# Altium PCB SENSEI_Base-Board_Clean.PcbDoc (part 5 of 7)
Units mm, origin at the board's own origin, x right, y up, seen from the top; angles counter-clockwise.
Board outline 25.2 x 15.15 mm, 8 copper layers (Top Sig/Pwr, GND1, Sig1, GND2, Sig2, Pwr, GND3, Bot Sig/Pwr), stack 1.53 mm thick; 187 components, 192 nets, 951 pads, 1831 vias.
Unrouted connection lines stored in the file: 214.
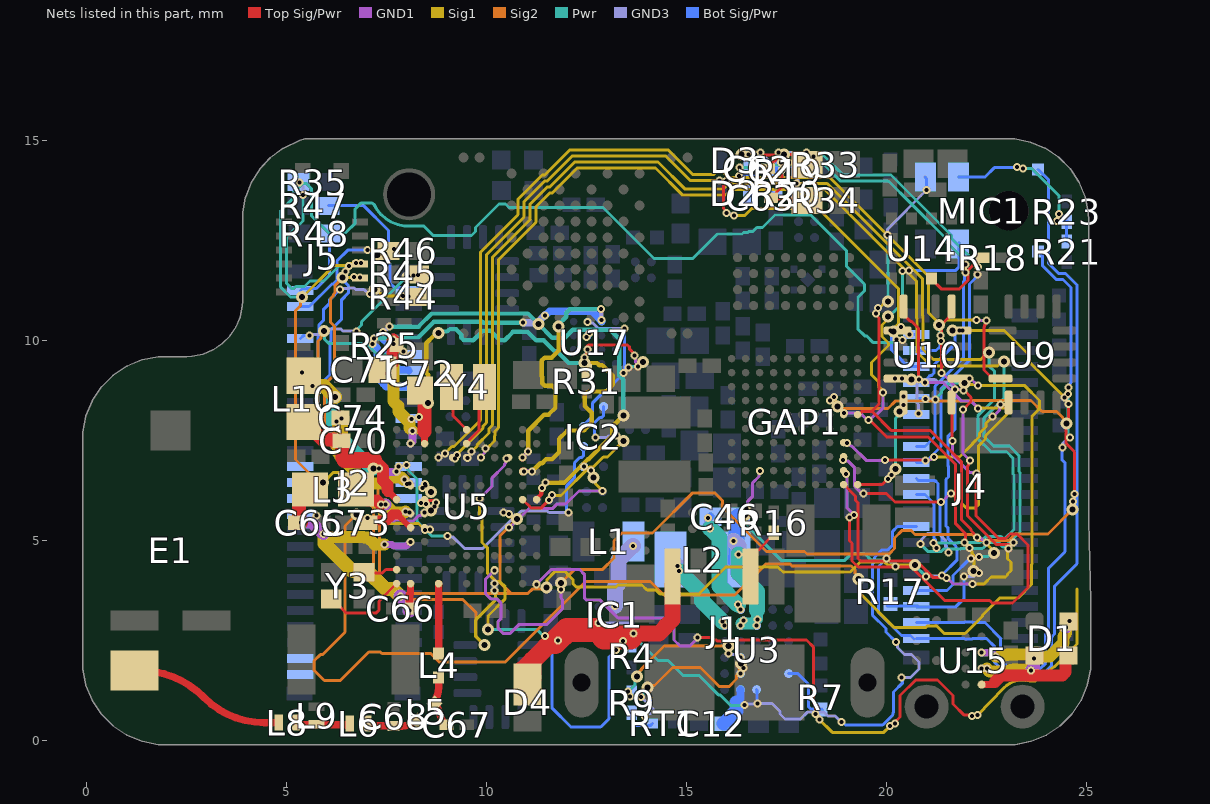
[diagram p10: the nets of this part, all layers, seen from the top]

## Via types
v1: diameter 0.2, hole 0.1, Top Sig/Pwr to GND1, 467 vias
v2: diameter 0.2, hole 0.1, GND3 to Bot Sig/Pwr, 431 vias
v3: diameter 0.2, hole 0.1, GND1 to Sig1, 369 vias
v4: diameter 0.3, hole 0.15, Sig1 to Pwr, 279 vias
v5: diameter 0.2, hole 0.1, Pwr to GND3, 270 vias
v6: diameter 0.3, hole 0.15, Top Sig/Pwr to Bot Sig/Pwr, tented both sides, 15 vias

## Nets (pads, with @x,y where several pads share a name; then routed paths per layer and width w, separated by ;. In a path a pad name is that pad's centre, name@x,y a point inside that pad or via, vN(x,y) a via of type N, cw(c..) or ccw(c..) an arc to the next point about the centre after c; other vN are vias at no path point) (continued)
MIC_CLK: GAP1.J6 J4.36 MIC1.6 R17.2 | length 16
  Top Sig/Pwr w0.075: GAP1.J6@18.925,8.15 18.925,8.179 v1(18.934,8.188) ; v1(19.544,8.018) 19.571,8.018 19.995,7.595 21.034,7.595 21.727,6.902 21.727,5.42 21.969,5.177 21.969,4.974 v1(21.945,4.95)
  GND1 w0.075: v1(18.934,8.188) 19.34,8.188 19.51,8.018 v1(19.544,8.018) 19.578,8.018 19.708,8.149 19.745,8.149 19.915,8.319 v3(19.915,8.704) ; v1(21.945,4.95) v1(21.945,4.95) 22.075,4.819 v3(22.075,4.817)
  GND3 w0.075: v5(20.397,11.736) 20.407,11.746 20.555,11.746 v2(20.565,11.756) ; v2(21.935,4.1) 22.179,4.1 22.271,4.192 v5(22.304,4.192)
  Sig1 w0.075: 19.886,10.103 20.05,9.938 20.05,9.876 19.624,9.45 19.624,9.143 19.791,8.975 19.791,8.861 19.915,8.737 v3(19.915,8.704) ; 19.886,10.103 19.886,10.389 20.035,10.538 v4(20.035,10.599) ; v3(22.075,4.817) 22.075,4.784 22.138,4.721 22.138,4.682 22.186,4.634 22.186,4.259 v4(22.17,4.243)
  Pwr w0.075: v4(20.035,10.599) 20.058,10.599 20.397,10.938 v5(20.397,11.736) ; v4(22.17,4.243) 22.253,4.243 v5(22.304,4.192)
  Bot Sig/Pwr w0.075: R17.2@20.013,3.362 20.745,3.362 J4.36@20.779,3.362 ; v2(20.565,11.756) 21.731,11.756 21.806,11.831 MIC1.6@21.806,12.454 ; J4.36@20.745,3.343 20.779,3.343 21.731,3.343 21.935,3.546 v2(21.935,4.1)
MIC_DATA: GAP1.K6 J4.34 MIC1.1 | length 14.9
  Top Sig/Pwr w0.075: GAP1.K6@19.275,8.15 19.305,8.15 19.386,8.231 19.632,8.231 ; v1(19.737,10.677) 19.737,10.637 19.812,10.562 19.812,8.411 19.632,8.231 ; v1(22.261,5.079) 22.261,5.098 22.109,5.25 22.109,5.281 21.877,5.513 21.877,6.964 21.778,7.062 21.084,7.756 20.106,7.756 19.632,8.231
  GND1 w0.075: v1(19.737,10.677) 19.761,10.701 19.761,10.757 19.787,10.782 v3(19.787,10.816) ; v1(22.261,5.079) 22.269,5.071 22.342,5.071 22.461,4.952 v3(22.495,4.952)
  GND3 w0.075: v5(20.018,12.636) 20.02,12.637 20.02,12.784 v2(20.999,13.763) ; v2(22.109,4.547) 22.131,4.569 22.289,4.569 v5(22.31,4.59)
  Sig1 w0.075: v3(19.787,10.816) 19.82,10.816 19.978,10.974 v4(20.035,10.974) ; v3(22.495,4.952) 22.495,4.918 22.682,4.73 v4(22.682,4.695)
  Pwr w0.075: v5(20.018,12.636) 20.037,12.617 20.037,10.975 v4(20.035,10.974) ; v5(22.31,4.59) 22.325,4.605 22.531,4.605 22.621,4.695 v4(22.682,4.695)
  Bot Sig/Pwr w0.075: J4.34@20.745,3.75 21.508,3.75 21.661,3.903 21.661,4.128 22.081,4.547 v2(22.109,4.547) ; MIC1.1@20.965,14.086 20.999,14.051 v2(20.999,13.763)
MIC_THSEL: GAP1.H7 J4.38 MIC1.5 | length 21.9
  GND1 w0.075: v1(18.579,8.501) 18.587,8.501 18.68,8.594 v3(18.688,8.594)
  Sig2 w0.075: v4(18.776,8.346) 18.818,8.304 19.076,8.304 19.078,8.302 20.034,8.302 20.216,8.484 22.076,8.484 22.092,8.5 23.611,8.5 23.881,8.23 24.246,8.23 24.407,8.069 24.407,8.049 24.495,7.961 v4(24.495,7.921)
  GND3 w0.075: v2(24.393,7.325) 24.403,7.335 24.403,7.419 24.561,7.576 v5(24.582,7.576) ; v5(24.533,8.667) 24.541,8.674 24.541,8.814 v2(24.549,8.822)
  Sig1 w0.075: v3(18.688,8.594) 18.712,8.57 18.712,8.505 18.733,8.484 18.733,8.389 v4(18.776,8.346)
  Pwr w0.075: v4@24.411,7.872 24.411,7.932 24.533,8.055 v5(24.533,8.667) ; v4(24.495,7.921) 24.439,7.865 24.486,7.865 24.534,7.817 24.534,7.659 24.582,7.61 v5(24.582,7.576)
  Bot Sig/Pwr w0.075: J4.38@20.745,2.95 21.944,2.95 21.96,2.966 22.136,2.966 22.152,2.95 22.458,2.95 22.862,2.546 22.852,2.535 22.852,2.014 23.078,1.787 23.832,1.787 23.978,1.934 23.978,2.657 24.048,2.726 24.048,4.31 24.461,4.724 24.461,6.946 24.379,7.028 24.379,7.311 v2(24.393,7.325) ; MIC1.5@23.79,12.225 23.903,12.113 23.903,11.865 24.241,11.527 24.413,11.527 24.611,11.329 24.611,8.947 24.593,8.929 24.573,8.909 24.573,8.846 v2(24.549,8.822)
MIC_WAKE: GAP1.C2 J4.40 MIC1.4 | length 26
  GND1 w0.075: v3(16.503,5.801) 16.527,5.825 16.527,5.983 16.653,6.108 16.653,6.444 16.807,6.599 16.807,6.717 v1(16.831,6.741)
  GND3 w0.075: v2(19.995,4.55) 20.011,4.55 20.204,4.356 v5(20.22,4.356)
  Sig1 w0.075: v4(16.46,5.637) 16.482,5.658 16.482,5.78 v3(16.503,5.801)
  Pwr w0.075: v4(16.46,5.637) 16.5,5.596 16.5,5.375 17.369,4.506 18.956,4.506 19.129,4.679 19.446,4.679 19.615,4.511 20.064,4.511 v5(20.22,4.356)
  Bot Sig/Pwr w0.075: v2(19.995,4.55) 19.799,4.354 19.799,3.585 19.799,3.198 20.369,2.628 20.598,2.628 J4.40@20.686,2.54 ; J4.40@20.745,2.55 21.951,2.55 21.96,2.541 22.136,2.541 22.145,2.55 22.5,2.55 22.702,2.348 22.702,1.952 22.81,1.844 22.81,1.825 22.998,1.637 23.894,1.637 24.128,1.872 24.128,2.595 24.198,2.664 24.198,3.859 24.761,4.423 24.761,7.59 24.763,7.591 24.763,8.146 24.763,9.698 24.763,11.302 24.762,11.389 24.475,11.677 24.322,11.677 ; MIC1.4@23.79,14.275 24.053,14.012 24.053,11.927 24.302,11.678 24.321,11.678
MSP_CS: J2.12 U5.C7 | length 0.7
  Top Sig/Pwr w0.075: U5.C7@8.45,6.025 8.472,6.003 8.655,6.003 8.706,5.952 v1(8.739,5.952)
  GND1 w0.075: v3(8.699,5.852) 8.699,5.878 8.716,5.895 8.716,5.928 v1(8.739,5.952)
  GND3 w0.075: v2(8.357,5.935) 8.364,5.928 8.472,5.928 v5(8.479,5.921)
  Sig1 w0.075: v4(8.615,5.757) 8.615,5.767 v3(8.699,5.852)
MSP_DR1: J2.13 U5.C8 | length 1.1
  Top Sig/Pwr w0.075: U5.C8@8.45,6.375 8.45,6.401 v1(8.466,6.417)
  GND1 w0.075: v3(8.399,6.309) 8.399,6.33 8.466,6.396 v1(8.466,6.417)
  GND3 w0.075: v2(8.009,6.414) 8.223,6.414 8.265,6.373 8.47,6.373 v5(8.473,6.376)
  Sig1 w0.075: v3(8.399,6.309) 8.433,6.309 8.479,6.263 8.563,6.263 v4(8.606,6.22)
  Pwr w0.075: v5(8.473,6.376) 8.473,6.364 8.606,6.231 v4(8.606,6.22)
MSP_DR2: J2.21 U5.H1 | length 15.2
  Top Sig/Pwr w0.075: v1(10.193,3.931) U5.H1@10.2,3.925
  GND1 w0.075: v3(10.193,3.756) v1(10.193,3.931)
  Sig2 w0.075: v4(5.94,10.244) 5.94,10.184 5.855,10.098 5.855,10.055 5.786,9.986 5.786,7.698 6.138,7.346 6.138,7.319 6.46,6.996 6.46,6.932 7.134,6.258 7.134,5.853 7.176,5.811 7.176,4.06 7.708,3.528 9.406,3.528 9.729,3.205 9.729,2.604 v4(9.945,2.388)
  GND3 w0.075: v5(7.925,9.725) 7.959,9.725 8.015,9.669 8.082,9.669 v2(8.106,9.645)
  Sig1 w0.075: v4(9.945,2.388) 9.727,2.605 9.727,3.02 10.253,3.546 10.217,3.582 10.217,3.732 v3(10.193,3.756)
  Pwr w0.075: v4(5.94,10.244) 5.95,10.234 5.95,10.032 6.051,9.931 6.987,9.931 7.27,9.648 7.542,9.648 7.619,9.725 v5(7.925,9.725)
  Bot Sig/Pwr w0.075: J2.21@8.055,9.65 8.101,9.65 v2(8.106,9.645)
MSP_T\R\S\T\: J2.50
MSP_TCK: J2.49
MSP_TDI: J2.39
MSP_TDO: J2.38
MSP_TMS: J2.40
MSP_VCC: J2.37
NetC12_1: C12.1 U3.D1 | length 1.1
  Bot Sig/Pwr w0.2: 16.247,0.957 16.346,1.057 16.346,1.271 U3.D1@16.35,1.275
  Bot Sig/Pwr w0.35: C12.1@15.916,0.425 15.962,0.425 15.968,0.431 15.968,0.469 16.247,0.747 16.247,0.957
NetC46_1: C46.1 L2.1 U3.C5 U3.D5 | length 4.1
  GND3 w0.2: v2(16.35,2.875) 16.425,2.95 v5(16.425,3) ; v2(16.75,2.875) 16.75,3.012 v5(16.767,3.029)
  GND3 w0.4: v2(16.173,4.993) 16.3,4.866 v5(16.3,4.65)
  Pwr w0.3: v5@16.375,2.925 16.647,2.925 16.765,3.043 16.765,3.265
  Pwr w0.4: v5(16.3,4.65) 16.3,4.19 16.765,3.725 16.765,3.265
  Bot Sig/Pwr w0.4: L2.1@16.2,4.525 16.252,4.577 16.252,5.569 16.284,5.6 C46.1@16.304,5.6
NetC46_2: C46.2 U3.D6 | length 2.7
  GND3 w0.2: v2(15.537,5.566) 15.537,5.355 v5(15.585,5.306) ; v5(16.283,3.401) 16.283,3.342 v2(16.35,3.275)
  Pwr w0.4: v5(15.585,5.306) 15.825,5.067 15.825,3.858 v5(16.283,3.401)
  Bot Sig/Pwr w0.2: v2(15.537,5.566) 15.562,5.566 C46.2@15.596,5.6
NetC62_1: C62.1 R19.2 R33.1 | length 4.3
  Top Sig/Pwr w0.075: v1(16.55,14.655) 16.568,14.637 17.342,14.637 ; C62.1@16.955,14.3 17.005,14.3 17.342,14.637 ; C62.1@17.031,14.297 17.042,14.297 C62.1@17.108,14.297 ; C62.1@17.031,14.3 C62.1@17.058,14.326 ; 17.396,14.637 17.342,14.637 ; R33.1@17.981,14.567 17.902,14.646 17.351,14.646 17.342,14.637
  GND1 w0.075: v1(16.55,14.655) 16.552,14.657 16.708,14.657 v3(16.71,14.658)
  GND3 w0.075: v5(16.85,14.7) 17.079,14.471 17.549,14.471 v2(17.565,14.455)
  Sig1 w0.075: v4(16.375,14.65) 16.379,14.654 16.706,14.654 v3(16.71,14.658)
  Pwr w0.075: v4(16.375,14.65) 16.766,14.65 16.816,14.7 v5(16.85,14.7)
  Bot Sig/Pwr w0.075: v2(17.565,14.455) 17.589,14.431 17.589,14.386 17.75,14.225 R19.2@17.8,14.225
NetC63_1: C63.1 R20.2 R34.1 | length 3.9
  Top Sig/Pwr w0.075: C63.1@17.079,13.538 C63.1@17.124,13.538 ; v1(17.384,14.262) 17.384,13.843 17.253,13.713 17.253,13.667 C63.1@17.124,13.538 ; R34.1@18.009,13.45 17.922,13.538 C63.1@17.124,13.538
  GND1 w0.075: v3(17.361,14.45) 17.372,14.439 17.372,14.273 v1(17.384,14.262)
  GND3 w0.075: v5@17.275,14.7 v5(17.3,14.7) ; v5@17.275,14.725 v5(17.3,14.7) ; v2(17.746,13.924) 17.746,13.943 17.78,13.977 17.78,14.54 17.621,14.7 v5(17.3,14.7)
  Sig1 w0.075: v3(17.361,14.45) 17.385,14.474 17.385,14.545 17.429,14.589 v4(17.429,14.65)
  Pwr w0.075: v5(17.3,14.7) 17.379,14.7 v4(17.429,14.65)
  Bot Sig/Pwr w0.075: v2(17.746,13.924) 17.746,13.704 R20.2@17.775,13.675
NetC65_1: C65.1 C66.1 L3.1 U5.B1 U5.B4 | length 7.8
  Top Sig/Pwr w0.18: 8.076,3.639 8.098,3.661 8.098,3.923 U5.B1@8.1,3.925 ; v1(8.1,4.969) U5.B4@8.1,4.975
  Top Sig/Pwr w0.2: 8.076,3.639 8.076,3.272 C66.1@8.092,3.257
  Top Sig/Pwr w0.35: C65.1@5.204,5.452 5.304,5.452 C65.1@5.308,5.456 ; v1(5.355,5.456) C65.1@5.308,5.456 ; L3.1@5.583,6.275 5.562,6.275 5.308,6.021 C65.1@5.308,5.456
  GND1 w0.18: v3(7.446,4.904) 7.45,4.9 7.633,4.9 7.671,4.862 7.988,4.862 8.095,4.969 v1(8.1,4.969)
  GND1 w0.3: v1(5.355,5.456) 5.622,5.456 v3(5.918,5.16)
  GND1 w0.35: v3(7.847,3.597) 8.069,3.374 v1(8.069,3.247)
  Sig1 w0.3: v3(5.918,5.16) v3@5.943,5.135 ; 6.018,5.09 6.92,5.09 6.931,5.078 7.024,5.078 7.199,4.904 v3(7.446,4.904)
  Sig1 w0.35: v3@5.943,5.135 5.943,4.932 6.642,4.234 7.021,4.234 7.47,3.785 7.659,3.785 v3(7.847,3.597)
  other v3: 5.745,5.623
NetC67_1: C67.1 L4.2 L5.1 | length 1.4
  Top Sig/Pwr w0.185: L5.1@8.625,0.9 ccw(c8.203,1.322) 8.8,1.322 L4.2@8.8,1.575 ; L5.1@8.699,0.924 L5.1@8.71,0.871 ; L5.1@8.75,0.9 8.911,0.439 C67.1@8.996,0.4
NetC68_1: C68.1 L5.2 L6.1 | length 1.3
  Top Sig/Pwr w0.185: L6.1@7.02,0.425 7.02,0.388 7.033,0.375 7.662,0.375 C68.1@7.675,0.362 7.883,0.362 ccw(c7.883,0.917) L5.2@8.275,0.525
NetC70_1: C70.1 L10.1 U5.A7 | length 3.8
  Top Sig/Pwr w0.18: 7.518,6.269 7.518,6.185 7.529,6.174 7.598,6.174 7.747,6.025 U5.A7@7.75,6.025
  Top Sig/Pwr w0.3: 7.187,7.013 7.271,6.929 7.281,6.929 7.413,6.797 7.413,6.497 7.518,6.391 7.518,6.269
  Top Sig/Pwr w0.35: L10.1@5.298,8.045 5.388,8.045 5.902,7.531 6.181,7.531 6.206,7.506 6.364,7.506 C70.1@6.371,7.5 6.385,7.5 6.391,7.494 6.391,7.069 6.447,7.013
  Top Sig/Pwr w0.4: 6.447,7.013 7.187,7.013
NetC71_1: C71.1 R25.1 U5.B11 | length 3.6
  Top Sig/Pwr w0.18: v1(8.097,7.427) U5.B11@8.1,7.425
  Top Sig/Pwr w0.3: C71.1@7.598,9.386 7.642,9.43 7.642,9.998 7.667,10.023 7.663,10.023 v1(7.657,10.03)
  GND1 w0.2: v1(8.097,7.427) 8.143,7.473 v3(8.143,7.742)
  GND1 w0.3: v3(7.668,9.912) 7.668,10.019 v1(7.657,10.03) 7.657,9.956 v3@7.669,9.944
  Sig1 w0.3: v3(7.668,9.912) 7.668,8.486 7.792,8.362 7.792,8.233 7.797,8.228 8.072,7.953 8.072,7.813 v3(8.143,7.742)
NetC72_1: C72.1 U5.C11 | length 1.3
  Top Sig/Pwr w0.18: 8.445,7.724 8.448,7.722 8.448,7.427 U5.C11@8.45,7.425
  Top Sig/Pwr w0.35: 8.445,7.724 8.445,8.69 C72.1@8.482,8.726
NetC73_1: C73.1 U5.B5 | length 1.3
  Top Sig/Pwr w0.15: 7.776,5.646 8.096,5.325 U5.B5@8.1,5.325
  Top Sig/Pwr w0.25: C73.1@7,5.5 7.006,5.506 7.506,5.506 7.647,5.647 7.776,5.647
NetC74_1: C74.1 U5.B8 | length 3.5
  Top Sig/Pwr w0.18: v1(8.075,6.425) 8.075,6.4 U5.B8@8.1,6.375
  Top Sig/Pwr w0.2: v1(6.25,7.975) 6.25,7.994 6.331,8.075 C74.1@6.346,8.075
  GND1 w0.18: v3(7.944,6.53) 7.95,6.53 8.051,6.429 8.071,6.429 v1(8.075,6.425)
  GND1 w0.2: v1(6.25,7.975) 6.325,8.05 v3(6.375,8.05)
  Sig1 w0.3: 6.331,7.212 6.331,7.113 7.02,6.425 7.37,6.425 7.422,6.477 7.445,6.477 7.541,6.573 7.869,6.573 v3@7.933,6.509
  Sig1 w0.4: 6.331,7.212 6.331,8.006 v3(6.375,8.05)
NetD1_2: D1.2 U15.B2 | length 2.9
  Top Sig/Pwr w0.18: U15.B2@22.375,2.2 22.379,2.204 22.381,2.204 v1(22.377,2.2)
  GND1 w0.18: v1(22.377,2.2) 22.381,2.196 22.631,2.196 22.723,2.103 v3(22.728,2.103)
  GND1 w0.3: v3(24.49,2.822) 24.49,2.903 v1(24.574,2.987)
  Sig1 w0.3: v3(22.728,2.103) 22.786,2.103 22.891,2.103 23.008,2.137 23.02,2.15 23.763,2.15 23.809,2.103 24.081,2.103 24.422,2.444 24.422,2.607 24.49,2.675 v3(24.49,2.822)
NetD1_3: D1.3 U15.D2 | length 2.7
  Top Sig/Pwr w0.18: U15.D2@22.375,1.4 22.379,1.404 22.647,1.404 22.707,1.464
  Top Sig/Pwr w0.3: 22.707,1.464 22.876,1.633 24.394,1.633 24.475,1.713 24.475,2.065 D1.3@24.57,2.16
NetD1_4: D1.4 U15.C2 | length 1.6
  Top Sig/Pwr w0.18: U15.C2@22.375,1.8 v1(22.375,1.802)
  GND1 w0.18: v1(22.375,1.802) 22.377,1.8 22.508,1.8 v3(22.511,1.798)
  GND1 w0.3: v3(23.607,1.751) 23.679,1.823 v1(23.679,2.05)
  Sig1 w0.3: v3(22.511,1.798) 22.507,1.794 22.573,1.728 23.046,1.728 23.081,1.762 23.176,1.775 23.607,1.775 v3(23.607,1.751)
NetD2_1: D2.1 J4.16 R20.1 | length 13.9
  GND3 w0.075: v2(16.314,14.114) 16.32,14.119 16.32,14.32 v5(16.325,14.325) ; v2(21.975,11.7) v2(21.975,11.7) 21.976,11.901 v5(21.977,11.902)
  Pwr w0.075: v5(16.325,14.325) 16.713,14.325 16.775,14.388 17.32,14.388 17.538,14.387 18.45,14.388 18.852,13.986 20.025,13.986 20.034,13.977 20.061,13.977 20.594,13.444 21.475,12.563 21.475,12.492 21.971,11.996 21.971,11.908 v5(21.977,11.902)
  Bot Sig/Pwr w0.075: v2(16.314,14.114) 16.736,14.114 R20.1@17.175,13.675 ; D2.1@16.56,13.691 16.576,13.675 R20.1@17.175,13.675 ; R20.1@17.225,13.675 R20.1@17.175,13.675 ; J4.16@20.745,7.35 20.96,7.35 21.209,7.599 21.209,8.855 21.925,9.571 21.925,11.478 21.951,11.504 21.951,11.676 v2(21.975,11.7)
NetD3_1: D3.1 J4.18 R19.1 | length 13
  GND3 w0.075: v2(18,14.7) 18.034,14.7 18.11,14.624 18.151,14.624 v5(18.175,14.6) ; v2(22.275,11.65) 22.277,11.652 22.277,11.836 v5(22.28,11.838)
  Pwr w0.075: v5(18.175,14.6) 18.188,14.613 18.437,14.613 18.914,14.136 19.817,14.136 19.819,14.137 20.113,14.137 21.625,12.625 21.625,12.554 22.315,11.865 22.288,11.838 v5(22.28,11.838)
  Bot Sig/Pwr w0.075: D3.1@16.637,14.315 16.639,14.313 17.163,14.313 R19.1@17.25,14.225 17.25,14.441 17.509,14.7 v2(18,14.7) ; J4.18@20.745,6.95 20.96,6.95 21.359,7.349 21.359,8.793 22.075,9.509 22.075,11.416 22.275,11.616 v2(22.275,11.65)
NetD4_2: D4.2 J1.1 | length 6.4
  Top Sig/Pwr w0.4: D4.2@10.899,1.796 11.128,2.025 11.462,2.359 ; D4.2@11.025,1.4 11.175,1.55 11.175,1.978 11.509,2.312 11.658,2.46 11.707,2.46 ; 13.601,2.581 13.701,2.681 14.315,2.681 14.476,2.842 14.476,2.859 14.644,3.026 14.644,3.87 J1.1@14.641,3.873
  Top Sig/Pwr w0.5: 12.709,2.775 12.903,2.581 12.931,2.581
  Top Sig/Pwr w0.6: 11.707,2.46 12.015,2.768 12.717,2.768 ; 12.931,2.581 13.601,2.581
NetE1_1: E1.1 L8.2 | length 4
  Top Sig/Pwr w0.185: E1.1@1.2,1.75 1.708,1.719 cw(c1.315,-0.566) 2.172,1.589 cw(c1.365,-0.439) 2.942,1.07 2.943,1.069 ccw(c4.44,2.57) 4.44,0.45 L8.2@4.8,0.45
NetIC1_A2: IC1.A2 L1.1 | length 1.7
  GND3 w0.4: v2(13.206,3.359) 13.206,3.838 13.301,3.933 13.301,4.515 v2(13.656,4.87)
  Bot Sig/Pwr w0.075: IC1.A2@13.2,3.35 13.2,3.353 v2(13.206,3.359)
NetIC1_B3: IC1.B3 R4.2 | length 1.4
  GND3 w0.075: v2(12.799,2.944) 13.555,2.944 13.581,2.918 13.645,2.854 13.645,2.7 v2(13.669,2.676)
  Bot Sig/Pwr w0.075: IC1.B3@12.8,2.95 IC1.B3@12.8,2.945 ; R4.2@13.645,2.352 13.669,2.376 v2(13.669,2.676) ; v2(12.799,2.944) IC1.B3@12.8,2.945
NetJ1_4: J1.4 R16.1 | length 1.4
  Top Sig/Pwr w0.075: J1.4@16.6,4.1 16.6,4.596 16.766,4.761 16.795,4.761 16.988,4.953 16.988,4.963 17.175,5.15 R16.1@17.175,5.196
NetJ2_25: J2.25 R47.2 | length 3.6
  Bot Sig/Pwr w0.075: R47.2@6.051,13.38 6.919,13.38 7.546,12.753 7.546,12.306 7.563,12.289 7.563,11.949 7.587,11.925 7.587,11.435 7.7,11.322 7.988,11.322 J2.25@8.056,11.254
NetJ2_26: J2.26 R48.1 | length 1.9
  Bot Sig/Pwr w0.075: J2.26@5.345,11.25 5.398,11.303 5.741,11.303 6.077,11.639 R48.1@6.077,12.674
NetJ2_27: J2.27 R46.1 | length 3.3
  GND1 w0.075: v3(7.458,12.178) 7.492,12.178 7.578,12.264 7.658,12.264 v1(7.682,12.288)
  GND3 w0.075: v2(7.02,12.259) 7.048,12.259 7.189,12.118 v5(7.218,12.118)
  Sig1 w0.075: v4(7.268,12.139) 7.288,12.158 7.438,12.158 v3(7.458,12.178)
  Pwr w0.075: v5(7.218,12.118) 7.247,12.118 v4(7.268,12.139)
  Bot Sig/Pwr w0.075: J2.27@5.345,10.85 5.565,10.85 6.132,11.417 6.169,11.417 6.262,11.511 6.262,11.993 6.529,12.259 v2(7.02,12.259)
NetJ2_29: J2.29 R45.1 | length 3.7
  Top Sig/Pwr w0.075: R45.1@8.285,11.658 8.29,11.653 v1(8.29,11.637)
  GND1 w0.075: v3(8.172,11.623) 8.179,11.63 8.283,11.63 v1(8.29,11.637)
  GND3 w0.075: v2(5.575,10.125) 5.598,10.148 5.788,10.148 5.825,10.185 5.952,10.185 6.054,10.286 6.361,10.286 6.406,10.241 6.734,10.241 v5(6.747,10.229)
  Sig1 w0.075: v4(8.026,11.595) 8.054,11.623 v3(8.172,11.623)
  Pwr w0.075: v5(6.747,10.229) 6.747,10.262 6.871,10.387 6.871,10.47 7.995,11.595 v4(8.026,11.595)
  Bot Sig/Pwr w0.075: J2.29@5.345,10.05 5.417,10.122 5.575,10.122 v2(5.575,10.125)
NetJ2_31: J2.31 R44.1 | length 4.7
  Top Sig/Pwr w0.075: v1(8.043,11.107) 8.066,11.085 R44.1@8.291,11.085
  GND1 w0.075: v3(7.911,11.12) 7.917,11.114 8.037,11.114 v1(8.043,11.107)
  GND3 w0.075: v2(6.335,11.283) 6.359,11.307 6.543,11.307 6.553,11.317 6.689,11.317 6.734,11.272 6.941,11.272 7.05,11.164 v5(7.083,11.164)
  Sig1 w0.075: v4(7.201,11.276) 7.247,11.276 7.403,11.12 v3(7.911,11.12)
  Pwr w0.075: v5(7.083,11.164) 7.086,11.164 7.199,11.276 v4(7.201,11.276)
  Bot Sig/Pwr w0.075: J2.31@5.345,9.25 5.565,9.25 5.782,9.467 5.782,9.488 5.788,9.493 5.788,10.094 5.807,10.113 5.807,10.393 5.917,10.503 5.917,10.773 6.076,10.932 6.076,11.024 v2(6.335,11.283)
NetJ2_34: J2.34 R35.1 | length 9.1
  GND3 w0.075: v2(5.318,13.953) 5.41,13.862 v5(5.41,13.635) ; v2(6.475,11.725) 6.475,11.754 6.562,11.841 v5(6.562,11.871)
  Pwr w0.075: v5(5.41,13.635) 5.41,12.989 5.132,12.711 5.123,12.711 5.002,12.59 5.002,11.429 5.123,11.308 5.185,11.308 5.231,11.354 5.45,11.354 5.585,11.489 5.937,11.489 6.312,11.864 6.555,11.864 v5(6.562,11.871)
  Bot Sig/Pwr w0.075: J2.34@5.345,8.05 5.565,8.05 5.782,8.267 5.782,8.288 5.788,8.293 5.788,8.86 6.082,9.155 6.082,9.24 6.088,9.246 6.088,9.97 6.107,9.989 6.107,10.269 6.376,10.538 6.376,11.024 6.547,11.195 6.547,11.371 6.475,11.443 v2(6.475,11.725)
NetL2_2: L2.2 U3.E5 | length 2
  GND3 w0.2: v5(15.9,2.975) 15.95,2.925 v2(15.95,2.875)
  GND3 w0.4: v2(14.777,4.367) 14.813,4.331 v5(14.813,4.237)
  Pwr w0.4: v5(14.813,4.237) 15.384,3.666 15.384,3.491 v5(15.9,2.975)
NetL3_2: L3.2 U5.B6 | length 1.5
  Top Sig/Pwr w0.18: v1(8.074,5.701) U5.B6@8.1,5.675
  Top Sig/Pwr w0.3: L3.2@6.976,6.294 6.976,6.058 7.038,5.996 7.261,5.996 7.356,5.901 v1(7.36,5.901)
  GND1 w0.18: v3(7.976,5.726) 7.98,5.722 8.009,5.722 8.026,5.705 8.071,5.705 v1(8.074,5.701)
  GND1 w0.3: v1(7.36,5.901) 7.469,5.901 v3(7.471,5.899)
  Sig1 w0.3: v3(7.471,5.899) 7.671,5.698 7.949,5.698 v3(7.976,5.726)
NetL4_1: L4.1 U5.D1 | length 1.8
  Top Sig/Pwr w0.185: L4.1@8.8,2.168 U5.D1@8.8,3.925
NetL6_2: L6.2 L8.1 L9.2 | length 1.6
  Top Sig/Pwr w0.185: L8.1@5.253,0.425 5.24,0.438 L8.1@5.24,0.45 ccw(c5.361,0.571) 5.361,0.4 L9.2@5.75,0.4 ; L9.2@5.858,0.392 L9.2@5.793,0.4 ; L6.2@6.567,0.32 6.58,0.332 L6.2@6.58,0.425 ; L6.2@6.575,0.4 L9.2@5.793,0.4 ; L9.2@5.793,0.4 5.755,0.4 L9.2@5.75,0.405 L9.2@5.793,0.4
NetL10_2: L10.2 U5.A9 | length 4.1
  Top Sig/Pwr w0.1: v1(7.749,6.723) v1(7.749,6.723)
  Top Sig/Pwr w0.35: v1(5.389,9.206) 5.411,9.184 L10.2@5.426,9.184
  GND1 w0.1: v1@7.741,6.716 v1(7.749,6.723)
  GND1 w0.2: v3(7.311,6.802) 7.397,6.716 v1@7.741,6.716
  GND1 w0.35: v1(5.389,9.206) 5.389,9.13 v3(5.65,8.869)
  Sig1 w0.1: v4(7.175,6.8) 7.308,6.8 v3(7.311,6.802)
  Sig1 w0.35: v3(5.65,8.869) 5.936,8.869 v4(6.214,8.591)
  Pwr w0.35: v4(6.214,8.591) 6.102,8.48 6.102,7.821 7.124,6.8 v4(7.175,6.8)
NetMIC1_2: MIC1.2 R21.1 R23.2 | length 4.3
  GND3 w0.075: v2(23.26,14.342) 23.281,14.321 23.395,14.321 v5(23.416,14.3) ; v2(24.265,12.987) 24.286,13.007 24.286,13.149 v5(24.306,13.169)
  Pwr w0.075: v5(23.416,14.3) 23.631,14.3 24.306,13.626 v5(24.306,13.169)
  Bot Sig/Pwr w0.075: MIC1.2@21.798,14.087 22.457,14.087 22.693,14.324 23.242,14.324 v2(23.26,14.342) ; v2(24.265,12.987) 24.514,12.987 R23.2@24.525,12.976 ; R21.1@24.5,12.475 24.5,12.929 R23.2@24.514,12.942
NetR7_1: R7.1 U3.A2 | length 1.5
  Bot Sig/Pwr w0.075: U3.A2@17.55,1.675 17.779,1.675 18.046,1.408 18.046,0.844 18.097,0.793 18.366,0.793 R7.1@18.392,0.766
NetR9_1: R9.1 RT1.1 U3.D2 | length 5.5
  Sig2 w0.075: v4(14.021,1.333) 14.064,1.376 14.199,1.376 14.652,1.829 15.343,1.829 15.825,1.347 16.057,1.347 16.247,1.537 16.247,1.633 16.32,1.706 16.32,1.89 v4(16.363,1.933)
  GND3 w0.075: v5(13.865,1.09) 14.155,0.8 14.155,0.728 14.104,0.677 14.065,0.677 13.988,0.6 v2(13.954,0.6) ; v2(16.35,1.675) 16.35,1.709 16.4,1.759 16.4,1.777 v5@16.43,1.807
  Pwr w0.075: v5(13.865,1.09) 13.865,1.124 14.025,1.283 v4@14.025,1.325 ; v4(16.363,1.933) 16.363,1.878 v5(16.424,1.817)
  Bot Sig/Pwr w0.075: R9.1@13.625,0.696 13.642,0.678 13.642,0.442 13.703,0.382 13.954,0.382 ; v2(13.954,0.6) 13.954,0.382 ; RT1.1@14.149,0.425 14.106,0.382 13.954,0.382
NetR9_2: R9.2 U3.D3 | length 3.8
  Sig2 w0.075: v4(13.755,1.598) 13.755,1.659 13.878,1.781 13.878,1.796 13.937,1.855 13.937,1.857 14.443,2.363 15.191,2.363 15.193,2.365 v4(16.045,2.365)
  GND3 w0.075: v5(13.538,1.222) 13.538,1.189 13.591,1.136 v2(13.591,1.103) ; v5(16.046,2.171) 16.07,2.147 16.248,2.147 16.314,2.081 v2(16.348,2.081)
  Pwr w0.075: v5(13.538,1.222) 13.712,1.396 13.712,1.555 v4(13.755,1.598) ; v5@16.046,2.172 v4(16.045,2.365)
NetR18_2: R18.2 U14.3 | length 1.9
  Top Sig/Pwr w0.075: U14.3@21.125,11.55 21.125,11.537 21.377,11.285 21.811,11.285 22.033,11.507 22.033,11.759 22.255,11.981 22.317,11.981 R18.2@22.421,12.086
NetU5_A1: U5.A1 Y3.1 | length 2.2
  Top Sig/Pwr w0.075: Y3.1@6.085,3.511 6.169,3.511 6.488,3.192 7.242,3.192 7.308,3.258 7.308,3.483 U5.A1@7.75,3.925
NetU5_A2: U5.A2 Y3.3 | length 0.8
  Top Sig/Pwr w0.075: Y3.3@7.01,4.193 7.397,4.193 7.479,4.275 U5.A2@7.75,4.275
NetU5_F11: U5.F11 Y4.1 | length 1.6
  Top Sig/Pwr w0.075: U5.F11@9.5,7.425 9.5,7.448 9.807,7.755 9.807,8.669 Y4.1@9.988,8.85
NetU5_F12: U5.F12 Y4.2 | length 1.2
  Top Sig/Pwr w0.075: Y4.2@9.163,8.796 9.163,8.112 U5.F12@9.5,7.775
nRF_btn: U5.L1 | length 20.6
  Top Sig/Pwr w0.075: v1(11.25,3.907) U5.L1@11.25,3.925 ; v1(15.269,2.575) 15.623,2.575 15.685,2.513 15.747,2.513 15.773,2.486 16.127,2.486 16.153,2.513 17.997,2.513 18.178,2.331 18.178,0.938 18.217,0.899 v1(18.217,0.659) ; v1(20.206,0.426) 20.206,0.46 20.337,0.591 20.337,1.124 20.726,1.513 21.274,1.513 21.663,1.124 21.663,0.916 21.943,0.636 22.109,0.636 v1(22.133,0.612)
  GND1 w0.075: v1(11.25,3.907) 11.25,3.911 11.614,4.275 12.322,4.275 12.453,4.144 12.453,3.555 12.497,3.511 12.844,3.511 13.294,3.061 14.539,3.061 14.685,2.915 14.685,2.517 14.839,2.363 15.081,2.363 15.269,2.551 v1(15.269,2.575) ; v1(18.217,0.659) 18.217,0.645 18.324,0.538 v3(18.324,0.524) ; v3(20.083,0.359) 20.111,0.359 20.178,0.426 v1(20.206,0.426) ; v1(22.133,0.612) 22.146,0.625 22.262,0.625 v3(22.275,0.638)
  Sig1 w0.075: v3(18.324,0.524) 18.642,0.206 19.93,0.206 v3(20.083,0.359) ; v3(22.275,0.638) 22.923,1.309 cw(c23.4,0.85) 23.575,1.489 23.716,1.489 23.736,1.504 24.19,1.841 24.222,1.873 24.763,2.413 24.763,3.792
nRF_P0.04: J4.20 U5.G10 | length 33.8
  Top Sig/Pwr w0.075: U5.G10@9.85,7.075 9.855,7.08 v1(9.865,7.08)
  GND1 w0.075: v1(9.865,7.08) 9.865,7.107 9.948,7.19 9.948,7.276 v3(9.968,7.296)
  GND3 w0.075: v5(20.85,4.909) 20.874,4.933 20.874,5.025 21.024,5.175 21.309,5.175 21.475,5.009 21.475,4.846 21.528,4.793 21.528,4.731 v2(21.552,4.707)
  Sig1 w0.075: v3(9.968,7.296) 10.002,7.296 10.196,7.491 10.196,7.61 10.21,7.623 10.21,7.735 10.296,7.822 10.296,12.024 11.234,12.961 11.234,13.349 11.577,13.692 11.643,13.692 12.264,14.312 13.715,14.312 14.224,14.312 14.901,13.635 15.969,13.635 16.114,13.779 18.453,13.779 20.748,11.485 20.748,10.57 20.763,10.555 20.763,9.717 21.114,9.365 22.771,9.365 22.878,9.471 v4(22.935,9.471)
  Pwr w0.075: v5(20.85,4.909) 21.028,4.731 21.374,4.731 21.436,4.794 21.841,4.794 21.85,4.802 22.401,4.802 22.556,4.957 22.791,4.957 22.905,4.843 22.967,4.843 23.337,5.213 23.337,6.701 23.313,6.725 23.313,7.121 23.071,7.363 22.675,7.363 22.431,7.607 22.431,8.056 22.935,8.56 v4(22.935,9.471)
  Bot Sig/Pwr w0.075: J4.20@20.745,6.55 20.799,6.496 21.215,6.496 21.286,6.425 21.286,6.026 21.289,6.022 21.338,5.974 21.338,5.141 21.382,5.096 21.382,4.994 21.496,4.88 21.496,4.797 21.552,4.741 v2(21.552,4.707)
nRF_P0.05: J4.22 U5.F10 | length 31.5
  Top Sig/Pwr w0.075: U5.F10@9.5,7.075 9.518,7.075 v1(9.526,7.068)
  GND1 w0.075: v1(9.526,7.068) 9.526,7.097 9.625,7.196 v3(9.625,7.225)
  GND3 w0.075: v5(21.17,4.944) 21.17,4.918 21.249,4.839 v2(21.249,4.814)
  Sig1 w0.075: v3(9.625,7.225) 9.765,7.365 9.765,7.393 10.06,7.689 10.06,7.797 10.146,7.884 10.146,12.086 11.084,13.023 11.084,13.411 11.515,13.842 11.581,13.842 12.202,14.462 14.286,14.462 14.963,13.785 15.907,13.785 16.051,13.929 18.515,13.929 20.898,11.547 20.898,10.632 20.913,10.617 20.913,9.779 21.167,9.525 22.356,9.525 22.532,9.701 v4(22.557,9.701)
  Pwr w0.075: v5(21.17,4.944) 21.779,4.944 21.788,4.952 22.339,4.952 22.494,5.107 22.853,5.107 22.905,5.056 22.967,5.056 23.187,5.275 23.187,6.639 23.163,6.663 23.163,7.059 23.009,7.213 22.613,7.213 22.281,7.545 22.281,8.118 22.702,8.539 22.702,9.228 22.557,9.373 v4(22.557,9.701)
  Bot Sig/Pwr w0.075: J4.22@20.745,6.15 20.96,6.15 21.136,5.974 21.136,5.963 21.188,5.912 21.188,5.064 21.225,5.026 21.225,4.837 v2(21.249,4.814)
nRF_P0.07/AMUX: J4.26 U3.C1 U5.J10 | length 27.3
  Top Sig/Pwr w0.075: v1(10.5,7.05) 10.5,7.062 10.513,7.075 U5.J10@10.55,7.075
  GND1 w0.075: v3(9.825,6.05) 9.83,6.05 10.13,6.35 10.13,6.557 10.448,6.874 10.448,6.911 10.476,6.939 10.476,7.026 v1(10.5,7.05)
  GND3 w0.075: v5(11.457,2.611) 11.491,2.611 11.572,2.53 11.755,2.53 v2(11.779,2.507) ; v2(13.236,2.263) 13.236,2.294 13.407,2.464 v5(13.407,2.495) ; v5(16.448,0.893) 16.464,0.909 16.759,0.909 v2(16.775,0.925) 17.14,0.925 17.334,0.731 17.334,0.662 17.459,0.537 17.845,0.537 18.019,0.711 18.436,0.711 18.461,0.686 18.487,0.66 18.533,0.614 18.715,0.614 v2(18.867,0.462) ; v2(20.24,2.459) 20.24,2.425 20.275,2.39 20.275,2.325 20.45,2.15 20.622,2.15 20.808,1.964 20.808,1.788 20.595,1.575 20.382,1.575 v2@20.378,1.578
  Sig1 w0.075: v3(9.825,6.05) 9.825,5.658 9.884,5.599 9.884,4.955 10.017,4.821 10.017,4.195 10.239,3.973 10.337,3.973 10.465,3.844 10.465,3.546 10.034,3.114 v4(10.034,2.772)
  Pwr w0.075: v4(10.034,2.772) 11.264,2.772 11.425,2.611 v5(11.457,2.611) ; v5(13.407,2.495) 13.791,2.495 14.285,2 14.541,2 14.909,1.632 15.307,1.632 15.794,1.145 15.833,1.145 16.098,0.88 16.435,0.88 v5(16.448,0.893)
  Bot Sig/Pwr w0.075: v2@11.754,2.496 11.754,2.45 11.629,2.325 11.629,1.555 11.629,0.82 12.112,0.337 12.852,0.337 13.062,0.547 13.062,2.089 v2(13.236,2.263) ; U3.C1@16.75,1.275 16.763,1.263 16.763,0.937 v2(16.775,0.925) ; v2(18.867,0.462) 18.9,0.462 18.974,0.387 19.903,0.387 20.128,0.613 20.142,0.626 cw(c21.88,0.122) 20.172,0.722 20.172,1.216 20.402,1.446 20.402,1.488 20.399,1.499 v2(20.375,1.575) ; 19.649,3.188 19.649,3.135 19.983,2.802 19.983,2.716 v2(20.24,2.459) ; 19.649,3.188 19.649,3.647 19.649,4.419 19.696,4.466 19.696,4.577 19.881,4.762 20.027,4.762 20.152,4.888 20.152,5.233 20.27,5.35 J4.26@20.745,5.35
nRF_P0.12_GAP_GPIO64: J4.12 J5.10 U5.J6 U10.4 | length 34.7
  Top Sig/Pwr w0.075: J5.10@6.718,11.586 6.824,11.586 v1(6.834,11.576) ; U5.J6@10.55,5.675 10.557,5.675 v1(10.562,5.67)
  Top Sig/Pwr w0.18: v1(20.212,9.054) 20.216,9.05 U10.4@20.225,9.05
  GND1 w0.075: v3(6.688,11.584) 6.692,11.58 6.83,11.58 v1(6.834,11.576) ; v3(10.418,5.699) 10.433,5.685 10.547,5.685 v1(10.562,5.67) ; v1(20.212,9.054) 20.214,9.052 20.388,9.052 v3(20.389,9.05)
  Sig2 w0.075: v4(6.393,11.574) 6.393,11.563 6.213,11.383 6.213,11.2 6.172,11.158 6.172,11.118 6.098,11.045 6.098,10.457 6.202,10.353 6.202,9.161 5.951,8.91 5.951,7.744 6.288,7.408 6.288,7.381 6.618,7.051 6.618,6.986 7.284,6.32 7.284,5.915 7.326,5.873 7.326,4.122 7.768,3.681 10.603,3.681 ; v4(10.759,5.542) 10.331,5.115 10.331,3.953 10.603,3.681 ; v4(11.5,3.822) 11.464,3.785 11.14,3.785 11.036,3.681 10.603,3.681
  GND3 w0.075: v2(20.8,8.175) 20.8,8.403 20.766,8.437 20.766,8.946 20.8,8.98 v5@20.8,9.025 ; v5(20.812,9.026) 20.816,9.022 21.215,9.022 21.268,8.969 21.519,8.969 v2(21.712,8.775) ; v5(20.982,4.097) 20.996,4.111 21.37,4.111 v2(21.384,4.125)
  Sig1 w0.075: v4(6.393,11.574) 6.398,11.579 6.683,11.579 v3(6.688,11.584) ; v3(10.418,5.699) 10.452,5.699 10.566,5.585 10.715,5.585 v4(10.759,5.542) ; v4(11.5,3.822) 11.514,3.835 11.514,4.03 11.715,4.231 11.954,4.231 12.157,4.028 12.157,3.924 12.239,3.842 13.234,3.842 13.284,3.892 13.887,3.892 14.017,3.761 14.24,3.761 14.341,3.66 15.298,3.66 15.974,4.336 17.287,4.336 17.408,4.215 19.089,4.215 19.334,4.46 19.956,4.46 20.029,4.387 v4(20.712,4.387) ; v3(20.389,9.05) 20.399,9.041 20.611,9.041 v4(20.621,9.031)
  Pwr w0.075: v4(20.621,9.031) 20.623,9.028 20.809,9.028 v5(20.812,9.026) ; v4(20.712,4.387) 20.712,4.377 20.982,4.107 v5(20.982,4.097)
  Bot Sig/Pwr w0.075: J4.12@20.745,8.15 20.77,8.175 v2(20.8,8.175) ; v2(21.384,4.125) 21.384,4.139 21.764,4.519 21.764,4.795 21.732,4.827 21.732,4.855 21.532,5.056 21.532,5.322 21.488,5.366 21.488,6.531 21.546,6.59 21.546,6.859 21.53,6.874 21.53,7.596 21.712,7.778 v2(21.712,8.775)
nRF_P0.12_GAP_GPIO64_GAP: GAP1.K1 U10.5 | length 3
  Top Sig/Pwr w0.075: GAP1.K1@19.275,6.4 19.89,6.4 v1(20.03,6.54)
  GND1 w0.075: v1(20.03,6.54) 20.03,6.547 20.122,6.639 v3(20.122,6.646) ; v3(20.418,8.386) 20.421,8.388 20.421,8.601 v1(20.423,8.604)
  Sig1 w0.075: v3(20.122,6.646) 20.122,6.669 20.22,6.767 v4(20.22,6.79) ; v4(20.324,8.221) 20.324,8.258 20.418,8.352 v3(20.418,8.386)
  Pwr w0.075: v4(20.22,6.79) 20.22,8.056 20.324,8.16 v4(20.324,8.221)
nRF_P0.31: J4.2 J5.8 U5.C5 | length 35.1
  Top Sig/Pwr w0.075: J5.8@6.718,11.936 v1(6.854,11.936) ; U5.C5@8.45,5.325 8.472,5.303 8.529,5.303 8.555,5.277 v1(8.589,5.277)
  GND1 w0.075: v3(6.74,11.941) 6.849,11.941 v1(6.854,11.936) ; v3(8.457,5.268) 8.461,5.273 8.584,5.273 v1(8.589,5.277)
  Sig2 w0.075: v4(5.386,11.091) 5.342,11.048 5.342,10.865 5.223,10.746 5.223,7.025 5.757,6.491 5.87,6.491 v4(5.913,6.448)
  GND3 w0.075: v5(20.403,10.009) 20.418,10.009 20.559,10.151 v2(20.574,10.151)
  Sig1 w0.075: v4(5.386,11.091) 5.4,11.091 6.19,11.882 6.486,11.882 6.527,11.923 6.722,11.923 v3(6.74,11.941) ; v4(5.913,6.448) 6.166,6.701 6.372,6.701 6.911,6.162 6.999,6.162 7.208,5.953 7.208,5.79 7.569,5.43 8.295,5.43 v3(8.457,5.268)
  Pwr w0.075: v4(5.386,11.091) 5.096,11.091 4.852,11.336 4.852,13.242 5.144,13.534 5.144,13.669 5.397,13.922 5.498,13.922 5.622,13.798 5.622,13.12 6.036,12.707 6.487,12.707 6.714,12.933 6.714,13.289 6.868,13.443 7.12,13.443 7.183,13.401 ccw(c8.048,13.825) 7.929,12.87 cw(c7.92,12.795) 7.953,12.862 8.43,12.862 8.664,12.628 9.624,12.628 9.722,12.726 9.722,12.828 10.309,13.415 10.473,13.415 10.559,13.329 12.908,13.329 14.186,12.051 15.154,12.051 15.767,12.663 16.386,12.663 16.421,12.699 16.519,12.699 16.543,12.723 16.648,12.723 16.755,12.829 16.897,12.829 17.209,13.141 18.106,13.141 18.998,12.249 18.998,11.855 19.447,11.407 19.447,11.245 19.279,11.077 19.279,10.292 19.451,10.121 19.496,10.121 19.668,9.949 20.257,9.949 v5(20.403,10.009)
  Bot Sig/Pwr w0.075: v2(20.574,10.151) 20.575,10.15 J4.2@20.745,10.15
nRF_P1.00_GAP_GPIO60: J4.4 U5.D10 U9.4 | length 25
  Top Sig/Pwr w0.075: v1(8.793,7.08) 8.798,7.075 U5.D10@8.8,7.075 ; v1(22.493,10.498) 22.469,10.474 22.469,10.399 22.442,10.372 22.442,10.345 22.437,10.34 22.437,9.263 22.65,9.05 U9.4@22.85,9.05
  GND1 w0.075: v1(8.793,7.08) 8.827,7.08 8.902,7.155 8.936,7.155 v3(8.96,7.179) ; v3(22.25,10.51) 22.257,10.504 22.487,10.504 v1(22.493,10.498)
  GND3 w0.075: v5(21.348,10.13) 21.359,10.13 21.359,9.99 v2(21.358,9.989)
  Sig1 w0.075: v3(8.96,7.179) 9.131,7.349 9.188,7.349 9.846,8.008 9.846,12.21 10.784,13.147 10.784,13.535 11.39,14.142 11.457,14.142 12.077,14.763 13.902,14.763 14.543,14.763 15.157,14.148 15.669,14.148 15.731,14.21 15.907,14.21 16.038,14.079 18.577,14.079 21.048,11.609 21.048,10.694 21.313,10.429 21.313,10.395 v4(21.304,10.395) ; v4@21.332,10.41 21.393,10.41 21.5,10.517 22.244,10.517 v3(22.25,10.51)
  Pwr w0.075: v4(21.304,10.395) 21.308,10.391 21.313,10.391 21.337,10.367 21.337,10.158 21.357,10.138 v5(21.348,10.13)
  Bot Sig/Pwr w0.075: J4.4@20.745,9.75 21.236,9.75 21.334,9.848 21.334,9.965 v2(21.358,9.989)
nRF_P1.00_GAP_GPIO60_GAP: GAP1.J4 U9.5 | length 5
  Top Sig/Pwr w0.075: v1(19.956,7.012) 20.181,7.012 20.183,7.014 20.961,7.014 v1(20.975,7) ; v1(22.85,8.399) 23.024,8.399 U9.5@23.05,8.425
  GND1 w0.075: v1(19.008,7.442) 19.028,7.442 19.105,7.365 19.13,7.365 19.489,7.007 19.951,7.007 v1(19.956,7.012) ; v1(20.975,7) 20.999,7.024 21.088,7.024 21.151,7.087 v3(21.184,7.087) ; v3(22.65,8.099) 22.662,8.099 22.826,8.263 22.826,8.375 v1(22.85,8.399)
  Sig1 w0.075: v3(21.184,7.087) 21.822,7.087 22.153,7.418 22.153,7.433 22.322,7.602 22.322,7.682 22.486,7.846 22.486,7.934 v3(22.65,8.099)
nRF_P1.01_GAP_GPIO61: J4.6 U5.E10 U10.1 | length 22.7
  Top Sig/Pwr w0.075: U5.E10@9.15,7.075 9.172,7.053 v1(9.204,7.053) ; v1(15.99,13.985) 15.99,13.951 15.919,13.88 15.919,13.303 16,13.222 v1(16,13.188) ; v1(20.1,10.25) U10.1@20.275,10.25
  GND1 w0.075: v1@9.204,7.103 v1(9.204,7.053) 9.26,7.109 v3(9.26,7.14) ; v3(15.819,13.998) 15.826,13.991 15.984,13.991 v1(15.99,13.985) ; v1(16,13.188) 16.024,13.164 16.109,13.164 16.151,13.123 v3(16.184,13.123) ; v1(20.1,10.25) 20.1,10.216 20.226,10.09 20.226,10.049 v3(20.25,10.025)
  GND3 w0.075: v2(20.125,10.225) 20.159,10.225 20.2,10.266 20.249,10.266 20.324,10.341 v5(20.358,10.341)
  Sig1 w0.075: v3(9.26,7.14) 9.26,7.161 9.91,7.81 9.91,7.859 9.996,7.946 9.996,12.148 10.934,13.085 10.934,13.473 11.452,13.992 11.519,13.992 12.139,14.612 14.48,14.612 15.095,13.998 v3(15.819,13.998) ; v3(16.184,13.123) 16.448,13.123 16.624,13.298 17.442,13.298 17.66,13.298 ; 17.661,13.298 18.298,13.298 20.298,11.298 20.298,10.422 20.158,10.282 v4@20.158,10.203 ; v4(20.167,10.233) 20.167,10.172 20.226,10.113 20.226,10.049 v3(20.25,10.025)
  Pwr w0.075: v4(20.167,10.233) 20.216,10.233 20.324,10.341 v5(20.358,10.341)
  Bot Sig/Pwr w0.075: v2@20.164,10.185 20.12,10.142 20.12,9.764 20.389,9.495 20.389,9.491 20.53,9.35 J4.6@20.745,9.35
nRF_P1.01_GAP_GPIO61_GAP: GAP1.J3 U10.16 | length 11.3
  Top Sig/Pwr w0.075: v1(19.425,6.171) 20,6.171 20.209,5.962 21.354,5.962 v1(21.359,5.967) ; U10.16@20.436,10.639 20.594,10.481 20.624,10.481 20.797,10.308 20.797,9.117 v1(20.963,8.951)
  GND1 w0.075: v1(18.909,7.017) 18.943,7.017 18.967,6.993 19.029,6.993 19.202,6.82 19.202,6.361 19.392,6.171 v1(19.425,6.171) ; v1(20.963,8.951) 21.411,8.951 21.878,8.484 22.113,8.484 v3(22.29,8.306) ; v1(21.359,5.967) 21.382,5.967 21.592,6.177 v3(21.615,6.177)
  Sig1 w0.075: v3(21.615,6.177) 21.627,6.177 21.991,5.812 22.209,5.812 22.303,5.907 22.303,7.371 22.472,7.54 22.472,7.62 23.042,8.19 23.042,8.252 22.983,8.311 22.295,8.311 v3(22.29,8.306)
nRF_P1.09_GAP_GPIO62: J4.8 U5.H2 U10.12 | length 29.2
  Top Sig/Pwr w0.075: v1(10.196,4.258) 10.196,4.271 U5.H2@10.2,4.275 ; v1(21.625,10.25) v5(21.825,10.25) ; v1(24.55,8.421) 24.55,7.956 24.479,7.885 24.479,7.438 24.698,7.218 v1(24.698,6.163)
  GND1 w0.075: v1(10.196,4.258) 9.975,4.037 9.975,3.674 10.105,3.544 10.256,3.544 10.364,3.436 10.364,3.059 10.288,2.983 10.288,2.807 10.413,2.682 10.589,2.682 10.814,2.908 11.511,2.908 11.892,3.289 11.892,3.525 11.857,3.56 v3(11.857,3.775) ; v1(21.625,10.25) v3(21.9,10.25) ; v3(24.453,8.577) 24.453,8.547 24.55,8.45 v1(24.55,8.421) ; v3(24.661,5.972) 24.698,6.009 v1(24.698,6.163)
  Sig2 w0.075: v4(11.86,3.945) 12.188,4.273 12.894,4.273 13.187,4.566 13.187,4.993 13.386,5.192 14.148,5.192 15.152,6.196 15.697,6.196 15.901,5.992 15.901,5.824 16.998,4.728 17.949,4.728 18.012,4.665 18.511,4.665 ; 18.512,4.665 19.658,4.665 ; 19.665,4.665 20.065,4.665 20.2,4.8 20.2,5.067 20.39,5.257 20.608,5.257 20.711,5.154 22.135,5.154 22.292,4.998 23.053,4.998 23.218,5.162 24.032,5.162 v4(24.65,5.78)
  GND3 w0.075: v2(21.647,10.243) 21.818,10.243 v5(21.825,10.25)
  Sig1 w0.075: v3(11.857,3.775) 11.859,3.777 11.859,3.943 v4(11.86,3.945) ; v4(21.65,10.25) v3(21.9,10.25) 21.904,10.254 22.944,10.254 23.572,9.626 23.572,9.458 v3(24.453,8.577) ; v4(24.65,5.78) 24.65,5.961 v3(24.661,5.972)
  Pwr w0.075: v4(21.65,10.25) v5(21.825,10.25)
  Bot Sig/Pwr w0.075: J4.8@20.745,8.95 20.96,8.95 21.037,9.028 21.037,9.079 21.081,9.122 21.122,9.122 21.188,9.188 21.188,9.393 21.706,9.911 21.706,10.15 21.662,10.193 v2@21.662,10.254
nRF_P1.09_GAP_GPIO62_GAP: GAP1.J1 U10.13 | length 14.6
  Top Sig/Pwr w0.075: GAP1.J1@18.925,6.4 18.932,6.4 19.217,6.115 19.217,6.016 19.287,5.946 19.287,4.553 19.353,4.487 20.751,4.487 21.164,4.074 21.488,4.074 v1(21.5,4.062) ; v1(21.368,9.188) 21.375,9.195 21.375,10.4 21.64,10.665 U10.13@21.64,10.684 ; U10.13@21.625,10.85 21.625,10.699 U10.13@21.64,10.684 ; U10.13@21.64,10.756 U10.13@21.64,10.684 ; U10.13@21.687,10.637 U10.13@21.64,10.684 ; v1(21.908,8.271) 22.112,8.475 22.112,8.583 21.945,8.75 v1(21.925,8.75) ; v1(22.086,7) 22.086,6.966 22.047,6.927 22.047,6.88 22.027,6.859 22.027,5.614 22.74,4.9 23.091,4.9 23.141,4.95 v1(23.175,4.95)
  GND1 w0.075: v1(21.368,9.188) 21.386,9.188 21.8,8.774 21.901,8.774 v1(21.925,8.75) ; v1(21.5,4.062) 21.517,4.062 21.659,3.92 v3(22.142,3.919) ; v1@21.908,8.252 v1(21.908,8.271) ; v1@21.932,8.257 21.908,8.233 21.908,7.178 v1(22.086,7) ; v3(23.049,4.8) 23.049,4.812 23.175,4.938 v1(23.175,4.95)
  Sig1 w0.075: v3(22.142,3.919) 22.44,3.919 22.609,4.088 22.974,4.088 23.025,4.139 23.025,4.166 23.107,4.248 23.107,4.466 23.025,4.548 23.025,4.61 23.026,4.611 23.026,4.777 v3(23.049,4.8)
nRF_P1.11_GAP_GPIO63: J4.10 U5.C6 U10.9 | length 36.1
  Top Sig/Pwr w0.075: v1(8.446,5.698) 8.446,5.679 U5.C6@8.45,5.675 ; U10.9@21.974,9.08 22.045,9.08 v1(22.075,9.05)
  GND1 w0.075: v3(7.024,5.565) 7.058,5.565 7.137,5.486 7.68,5.486 7.713,5.519 7.925,5.519 7.959,5.486 8.161,5.486 8.305,5.63 8.365,5.63 8.434,5.698 v1(8.446,5.698) ; v1(22.075,9.05) 22.095,9.05 22.264,8.881 v3(22.283,8.881)
  Sig2 w0.075: v4(6.748,5.656) 6.461,5.368 6.461,2.711 5.898,2.148 5.841,2.148 5.687,1.994 5.687,1.756 5.944,1.5 6.342,1.5 7.054,2.213 7.345,2.213 7.381,2.176 8.606,2.176 8.823,1.959 10.458,1.959 12.471,3.973 14.096,3.973 14.431,3.638 16.203,3.638 16.976,4.411 17.588,4.411 17.634,4.365 18.145,4.365 19.115,4.365 19.21,4.269 19.21,4.181 19.295,4.097 v4(19.295,4.036)
  GND3 w0.075: v2(20.978,8.542) 20.984,8.537 21.218,8.537 v5(21.223,8.532)
  Sig1 w0.075: v4(6.748,5.656) 6.809,5.656 6.876,5.589 7,5.589 v3(7.024,5.565) ; v4(19.295,4.036) 19.307,4.023 19.307,3.773 19.345,3.736 19.345,3.67 20.193,2.822 20.972,2.822 21.014,2.863 21.252,2.863 21.44,2.675 21.966,2.675 22.397,3.105 22.397,3.133 22.671,3.407 22.671,3.408 22.826,3.563 23.288,3.563 23.625,3.9 23.625,4.398 23.638,4.41 23.638,4.784 23.636,4.785 23.636,8.11 23.825,8.298 23.825,8.501 23.454,8.872 22.292,8.872 v3(22.283,8.881) ; v4(21.951,8.936) 21.982,8.905 22.252,8.905 v3@22.28,8.878
  Pwr w0.075: v5(21.223,8.532) 21.223,8.547 21.366,8.69 21.366,8.743 21.56,8.936 v4(21.951,8.936)
  Bot Sig/Pwr w0.075: J4.10@20.745,8.55 20.971,8.55 v2(20.978,8.542)
nRF_P1.11_GAP_GPIO63_GAP: GAP1.J2 U10.8 | length 13.5
  Top Sig/Pwr w0.075: v1(19.075,5.572) 19.075,4.993 19.137,4.931 19.137,4.491 19.291,4.337 20.613,4.337 21.45,3.5 22.576,3.5 22.637,3.439 23.148,3.439 23.538,3.828 23.538,4.888 23.263,5.163 23.087,5.163 22.975,5.05 22.802,5.05 22.239,5.614 22.239,6.664 v1(22.25,6.675) ; U10.8@21.625,8.45 21.637,8.437 21.637,7.504 v1(21.65,7.491)
  Top Sig/Pwr w0.15: GAP1.J2@18.98,6.683 18.98,6.686 GAP1.J2@18.925,6.741 ; v1(18.989,6.66) 18.989,6.673 18.976,6.686 18.976,6.689 GAP1.J2@18.925,6.741 ; GAP1.J2@18.925,6.741 GAP1.J2@18.925,6.75 GAP1.J2@18.925,6.741
  GND1 w0.075: v1(18.989,6.66) 19.005,6.645 19.005,5.829 19.18,5.654 v3(19.18,5.64) ; v1(19.075,5.572) 19.075,5.577 v3@19.152,5.654 ; v1(21.65,7.491) 21.65,7.136 22.087,6.699 22.226,6.699 v1(22.25,6.675)
nRF_QSPI_CLK: J2.20 U5.L7 U17.B3 | length 13.5
  Top Sig/Pwr w0.111: U5.L7@11.25,6.025 11.25,6.046 11.371,6.167 11.371,6.308 v1@11.378,6.316
  GND1 w0.111: v1(11.388,6.319) 11.388,6.341 11.475,6.428 v3(11.475,6.45)
  GND3 w0.111: v2(7.414,10.218) 7.428,10.218 7.561,10.35 v5(7.575,10.35) ; v2(12.498,10.094) 12.498,10.106 v5@12.571,10.179 ; v2@12.519,10.127 v5@12.571,10.179 ; v5@12.571,10.179 v5(12.571,10.191) v5@12.571,10.179
  Sig1 w0.111: v3(11.475,6.45) 11.945,6.45 12.533,7.037 12.554,7.037 13.139,7.622 13.139,7.846 13.419,8.126 v4(13.419,8.132)
  Pwr w0.111: v5(7.575,10.35) 8.298,10.35 8.625,10.677 11.032,10.677 v4(11.295,10.414) 11.636,10.073 11.957,10.073 12.153,10.268 12.598,10.268 v5@12.605,10.262 ; v5(12.571,10.191) 12.573,10.193 v5@12.573,10.268 ; v5@12.611,10.268 13.088,10.268 13.32,10.036 13.32,9.123 13.413,9.029 13.413,8.138 v4(13.419,8.132)
  Bot Sig/Pwr w0.185: v2(7.414,10.218) 7.417,10.215 7.417,10.032 7.521,9.928 7.521,9.507 7.656,9.373 7.712,9.373 7.817,9.268 8.037,9.268 J2.20@8.055,9.25 ; v2(12.498,10.094) 12.525,10.121 U17.B3@12.525,10.125
nRF_QSPI_CS: IC2.A1 U5.K7 | length 5
  Top Sig/Pwr w0.075: U5.K7@10.9,6.025 11.108,5.817 11.323,5.817 11.368,5.817 11.556,6.005 v1(11.556,6.011)
  GND1 w0.075: v1(11.556,6.011) 11.556,6.034 11.638,6.116 v3(11.638,6.139)
  GND3 w0.075: v2(12.725,7.575) 13.001,7.575 13.039,7.613 13.239,7.613 v5(13.251,7.625)
  Sig1 w0.075: v3(11.638,6.139) 11.649,6.127 11.86,6.127 12.569,6.836 12.662,6.836 12.917,7.091 13.02,7.091 v4(13.419,7.49)
  Pwr w0.075: v5(13.251,7.625) 13.267,7.625 13.403,7.49 v4(13.419,7.49)
  Bot Sig/Pwr w0.075: v2(12.725,7.575) 12.701,7.599 12.701,7.755 12.699,7.757 12.699,7.943 12.832,8.076 12.881,8.076 12.925,8.119 IC2.A1@12.925,8.35
nRF_QSPI_CS_CONN: IC2.C2 J2.14 | length 8.1
  GND3 w0.075: v2(7.801,6.857) 7.818,6.873 7.983,6.873 v5(8,6.89) ; v5(9.017,5.12) 9.041,5.096 9.156,5.096 9.446,4.806 9.91,4.806 10.743,5.639 10.764,5.639 10.866,5.741 11.52,5.741 11.554,5.707 v2(12.045,5.707)
  Pwr w0.075: v5(8,6.89) 8.024,6.866 8.024,6.778 8.26,6.541 8.26,5.481 8.621,5.12 v5(9.017,5.12)
  Bot Sig/Pwr w0.075: v2(12.045,5.707) 12,5.751 12,6.369 12.2,6.568 12.2,6.943 12.332,7.076 12.381,7.076 12.425,7.119 IC2.C2@12.425,7.35
nRF_QSPI_CS_RAM: IC2.B2 R31.1 U17.A3 | length 7
  Top Sig/Pwr w0.075: R31.1@12.5,9.234 12.5,9.844 12.544,9.887 13.523,9.887 13.576,9.834 13.576,9.783 13.7,9.659 v1(13.7,9.625)
  GND1 w0.075: v1(13.7,9.625) 13.724,9.601 13.724,9.45 13.786,9.387 v3(13.786,9.353)
  GND3 w0.075: v2(12.528,10.465) 12.552,10.441 12.65,10.441 12.785,10.306 13.034,10.306 13.044,10.297 v2(13.445,10.297) ; v2(13.421,9.194) 13.421,9.198 13.55,9.328 v5(13.55,9.331)
  Sig1 w0.075: v3(13.786,9.353) 13.79,9.353 13.904,9.467 v4(13.907,9.467)
  Pwr w0.075: v5(13.55,9.331) 13.574,9.355 13.735,9.355 13.847,9.467 v4(13.907,9.467)
  Bot Sig/Pwr w0.075: IC2.B2@12.425,7.85 12.425,7.881 12.651,8.107 12.651,8.445 12.903,8.698 12.939,8.698 v2@13.445,9.204 ; U17.A3@12.525,10.475 12.528,10.472 v2(12.528,10.465) ; v2(13.421,9.194) 13.431,9.204 v2@13.445,9.204 ; v2(13.445,10.297) v2@13.445,9.204
nRF_QSPI_CS_SEL: IC2.D2 U5.J5 | length 3.6
  Top Sig/Pwr w0.075: U5.J5@10.55,5.325 v1(10.555,5.33)
  GND1 w0.075: v1(10.555,5.33) 10.583,5.33 11.071,5.817 11.358,5.817 11.377,5.799 11.644,5.799 11.764,5.919 11.987,5.919 12.308,6.24 v3(12.901,6.24)
  GND3 w0.075: v2(12.435,6.85) 12.469,6.85 12.548,6.771 12.587,6.771 v5(12.611,6.747)
  Sig1 w0.075: v4(12.677,6.573) 12.72,6.53 12.72,6.42 v3(12.901,6.24)
  Pwr w0.075: v5(12.611,6.747) 12.635,6.723 12.635,6.616 v4(12.677,6.573)
  Bot Sig/Pwr w0.075: IC2.D2@12.425,6.85 v2(12.435,6.85)
nRF_QSPI_IO0: J2.19 U5.K10 U17.A2 | length 13.9
  GND1 w0.111: v1(10.9,7.074) 10.9,7.079 11.04,7.219 v3(11.04,7.223)
  GND3 w0.111: v5(12.864,10.785) 12.868,10.781 12.868,10.524 v2(12.873,10.519)
  GND3 w0.185: v2(7.152,9.919) 7.155,9.922 7.155,10.017 7.191,10.053 v5(7.191,10.057) ; v5(10.914,10.446) 10.917,10.449 11.276,10.449 11.456,10.629 v2(11.46,10.629)
  Sig1 w0.111: v3(11.04,7.223) 11.04,7.748 11.441,8.149 11.549,8.149 11.721,8.322 11.721,8.786 11.638,8.87 11.455,8.87 11.39,8.934 11.39,9.093 11.384,9.1 11.384,9.505 11.455,9.576 11.63,9.576 11.798,9.744 v4(11.798,10.353)
  Pwr w0.111: v5(7.191,10.057) 7.492,10.057 7.512,10.077 8.288,10.077 8.682,10.471 9.892,10.471 9.917,10.446 v5(10.914,10.446) ; v4(11.798,10.353) 11.798,10.404 11.991,10.597 11.991,10.695 12.082,10.785 v5(12.864,10.785)
  Bot Sig/Pwr w0.185: v2(7.152,9.919) 7.152,9.915 7.262,9.805 7.262,9.081 7.417,8.925 7.493,8.85 J2.19@8.055,8.85 ; v2(11.46,10.629) 11.464,10.629 11.572,10.737 12.634,10.737 12.787,10.584 12.787,10.564 U17.A2@12.875,10.475 ; U17.A2@12.853,10.499 v2(12.873,10.519)
nRF_QSPI_IO1: J2.17 U5.K9 U17.C3 | length 12.5
  Top Sig/Pwr w0.185: U5.K9@10.9,6.725 10.906,6.731 v1(10.93,6.731)
  GND1 w0.111: v1@10.93,6.731 v3@11.138,6.731
  GND3 w0.111: v2(8.127,8.043) 8.144,8.06 8.252,8.06 8.28,8.088 v5(8.304,8.088) ; v5(12.443,9.577) 12.443,9.601 12.51,9.668 12.51,9.762 v2(12.527,9.78)
  Sig1 w0.111: v4(8.539,8.436) 8.539,9.142 8.49,9.191 8.49,9.933 8.687,10.129 8.736,10.129 v4(8.798,10.191) ; v3(11.138,6.73) 11.342,6.935 11.388,6.935 11.485,7.031 11.633,7.031 11.81,7.208 11.81,7.543 12.02,7.753 12.437,7.753 12.629,7.945 12.629,8.194 12.449,8.374 12.449,8.646 12.497,8.694 cw(c12.575,8.616) 12.578,8.727 12.844,8.72 ccw(c12.85,8.95) 12.868,8.72 12.955,8.727 ccw(c12.947,8.838) 13.025,8.759 13.157,8.891 13.157,9.123 12.895,9.386 12.817,9.386 12.763,9.44 v4(12.445,9.44)
  Pwr w0.111: v5(8.304,8.088) 8.503,8.287 8.503,8.4 v4(8.539,8.436) ; v4(8.798,10.191) 8.835,10.227 9.017,10.227 9.075,10.285 9.236,10.285 9.369,10.153 9.369,10.076 9.433,10.011 9.665,10.011 9.895,10.241 10.108,10.241 10.337,10.011 10.453,10.011 10.658,10.216 11.029,10.216 11.24,10.004 11.428,10.004 11.693,9.74 11.751,9.74 12.051,9.44 v4(12.445,9.44) ; v4(12.445,9.44) v5@12.444,9.577
  Bot Sig/Pwr w0.185: J2.17@8.055,8.05 8.12,8.05 v2(8.127,8.043)